# Altium PCB body.PcbDoc
Units mil, origin at the board's own origin, x right, y up, seen from the top; angles counter-clockwise.
Board outline 3199.5 x 3600.37 mil, 2 copper layers (Top Layer, Bottom Layer), stack 40.6 mil thick; 63 components, 68 nets, 275 pads, 47 vias.
Unrouted connection lines stored in the file: 49.
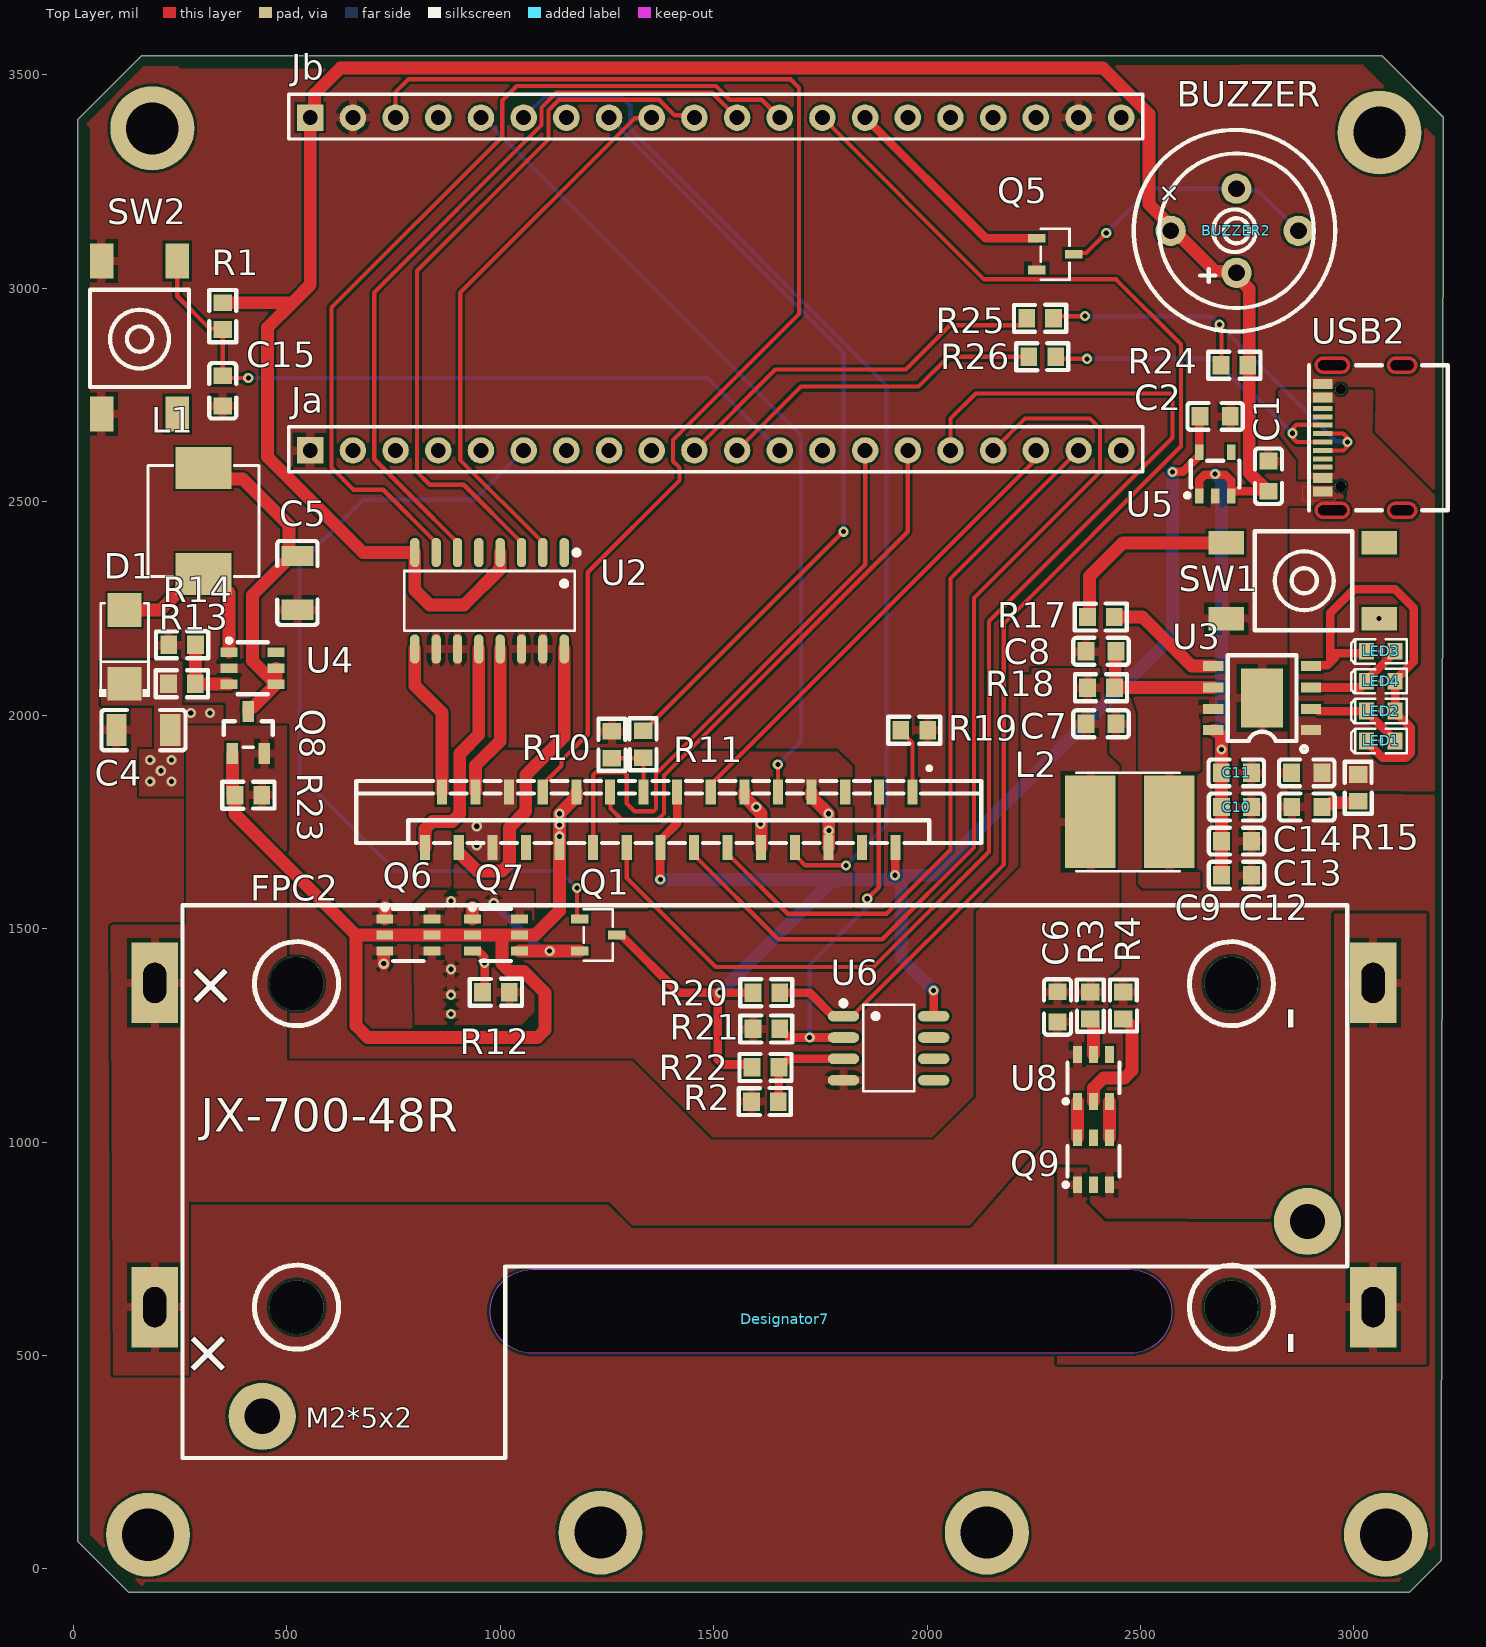
[diagram p0: Top Layer view]
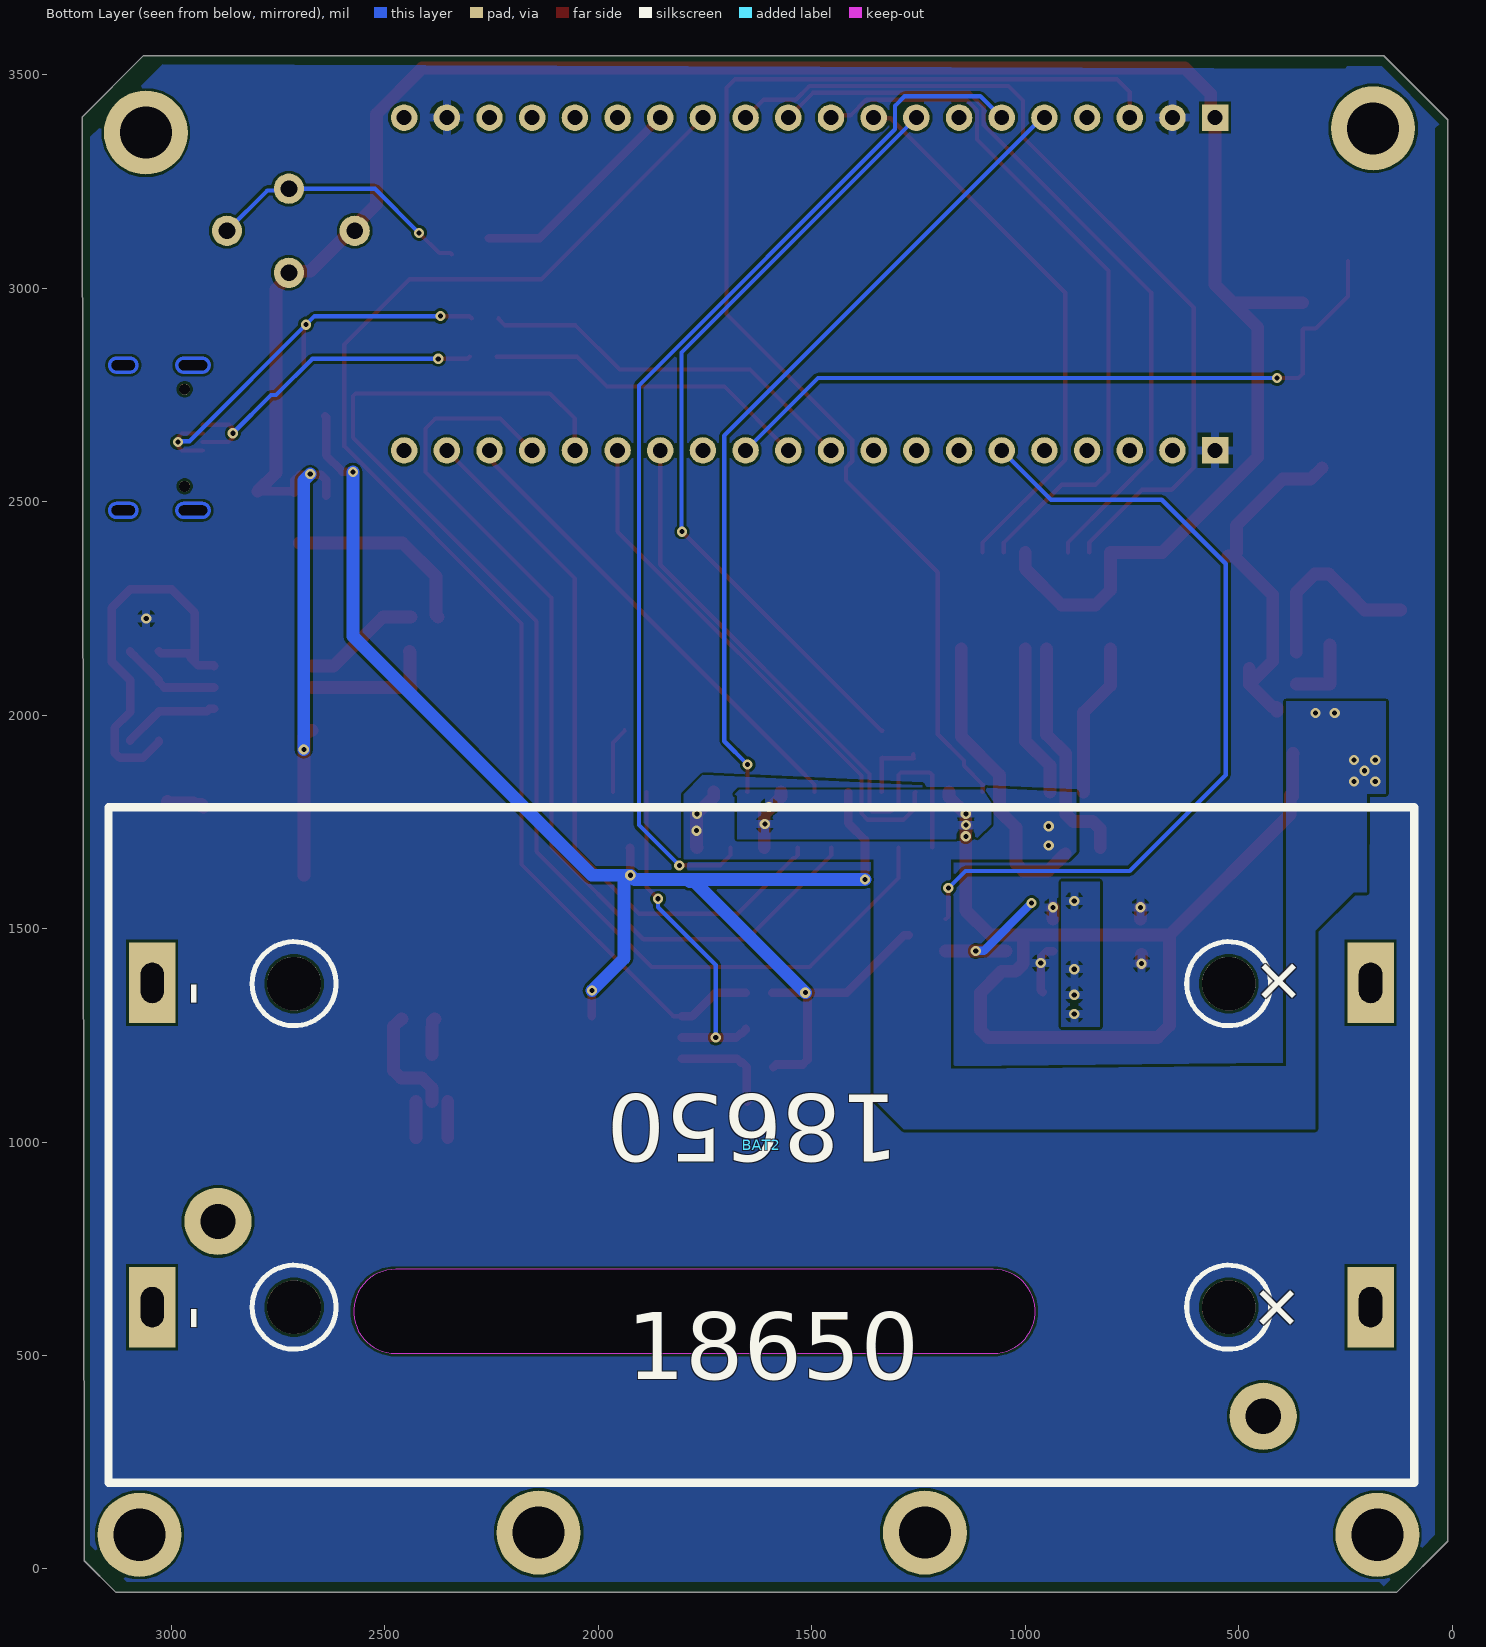
[diagram p1: Bottom Layer view, seen from below]

## Layer stack, top to bottom
Top Solder: solder mask 0.4, Solder Resist, Dk 3.5
Top Layer: signal copper 1.4
Dielectric 1: dielectric 12.6, FR-4, Dk 4.8
Dielectric3: dielectric 12.6, FR-4, Dk 4.8
Dielectric2: dielectric 12.6, FR-4, Dk 4.8
Bottom Layer: signal copper 1.4
Bottom Solder: solder mask 0.4, Solder Resist, Dk 3.5

## Board outline
10,65 10,3395 160,3545 162.77,3545.37 3065.34,3545.37 3209.5,3400.76 3204.21,19.09 3129.89,-55 130,-55
cut-out: 1075,701.85 2475,701.85 cw(c2475,603.42) 2475,505 1075,505 cw(c1075,603.42)
board region "Cavity : Designator7": 1071.22,704.16 2471.22,704.16 2480.92,704.16 2499.93,700.38 2517.84,692.96 2533.97,682.19 2547.67,668.48 2558.45,652.36 2565.87,634.45 2569.65,615.43 2569.65,596.04 2565.87,577.03 2558.45,559.12 2547.67,543 2533.97,529.29 2517.84,518.51 2499.93,511.1 2480.92,507.31 2471.22,507.31 1071.22,507.31 1061.53,507.31 1042.51,511.1 1024.6,518.51 1008.48,529.29 994.77,543 984,559.12 976.58,577.03 972.8,596.04 972.8,615.43 976.58,634.45 984,652.36 994.77,668.48 1008.48,682.19 1024.6,692.96 1042.51,700.38 1061.53,704.16
board region "Layer Stack Region 1": 10,65 10,3395 160,3545 162.77,3545.37 3065.35,3545.37 3209.5,3400.76 3204.21,19.09 3129.89,-55 130,-55

## Design rules (kind name [scope] priority, off if disabled: settings)
Clearance [All] p1: gap=6 ignorepadtopadclearanceinfootprint=FALSE
HoleSize [All] p1: absolutevalues=TRUE maxlimit=500 minlimit=1 maxpercent=80.000 minpercent=20.000
MinimumSolderMaskSliver [All] p1: minsoldermaskwidth=0
PolygonConnect G [InNet('GND') vs HasFootprint('USB-C-SMD_TYPE-C16PIN') And OnLayer('Top Layer')] p1: connectstyle=Direct reliefconductorwidth=10 reliefentries=4 polygonreliefangle="90 Angle" airgapwidth=10
PolygonConnect 5v [InNet('+5V')] p2: connectstyle=Direct reliefconductorwidth=10 reliefentries=4 polygonreliefangle="90 Angle" airgapwidth=10
PolygonConnect PolygonConnect_1 [InNet('VH')] p3: connectstyle=Direct reliefconductorwidth=10 reliefentries=4 polygonreliefangle="90 Angle" airgapwidth=0
PolygonConnect [All] p4: connectstyle=Relief reliefconductorwidth=20 reliefentries=4 polygonreliefangle="90 Angle" airgapwidth=10
RoutingVias [All] p1: holewidth=28 width=50 viastyle="Through Hole" minholewidth=28 minwidth=50 maxholewidth=28 maxwidth=50
SilkToSilkClearance [All] p1: silktosilkclearance=0
SilkToSolderMaskClearance [IsPad] p1: minsilkscreentomaskgap=0 clearancetoexposedcopper=TRUE
SolderMaskExpansion [All] p1: expansion=4 istentingtop=FALSE
Width [All] p1: maxlimit=40 minlimit=6 preferedwidth=10
26 further rules are at their usual default settings.

## Components (designator, comment, footprint, x,y, rotation, side; value= is the part's Value field where it differs from the comment)
BAT2 "18650两颗母座-插针" ? 1618,993.13 r0 bottom locked
BUZZER "TMB12A03" BUZ-TH_BD12.0-P7.60-D0.6-FD 2720.39,3135 r0 top (schematic designator BUZZER1)
BUZZER2 "HNB09A03" BUZ-TH_BD9.0-P5.00-D0.6-FD 2725,3135 r90 top
C1 "1u" C0603 2800,2560 r270 top
C2 "1u" C0603 2675,2700 r180 top
C4 "22u" C1206 164.28,1964.94 r180 top
C5 "22u" C1206 525,2310 r270 top
C6 "0.1u" C0603 2305.68,1316.6 r270 top
C7 "22u" C0603 2407.65,1979.95 r0 top
C8 "22u" C0603 2407.65,2149.8 r180 top
C9 "22u" C0603 2725,1705 r0 top
C10 "22u" C0603 2725,1785 r0 top
C11 "22u" C0603 2724.57,1865 r0 top
C12 "22u" C0603 2725,1625 r0 top
C13 "10u" C0603 2890,1785 r180 top
C14 "10u" C0603 2889.57,1865 r180 top
C15 "0.1u" C0603 350,2760 r270 top
D1 "SS34" SMA_L4.3-W2.6-LS5.2-RD 120,2160 r90 top
Designator7 "Comment" "PCBComponent_1 - duplicate" 1620,955 r0 top
FPC2 "F1003A-ZV-30-25T-R" FPC-SMD_F1003A-ZV-30-25T-R 1395,1755 r180 top locked
Ja "HDR-M-2.54_1x20" HDR-M-2.54_1X20 1505,2620.37 r180 top
Jb "HDR-M-2.54_1x20" HDR-M-2.54_1X20 1505,3400 r180 top
L1 "3.3uH" IND-SMD_L7.1-W6.6 305,2455 r270 top
L2 "1uH" IND-SMD_L5.8-W5.2 2475,1750 r0 top
LED1 "LED-0603_B" LED0603_RED 3062.96,1939.8 r180 top
LED2 "LED-0603_B" LED0603_RED 3062.96,2009.8 r180 top
LED3 "LED-0603_B" LED0603_RED 3062.96,2149.8 r180 top
LED4 "LED-0603_B" LED0603_RED 3062.96,2079.8 r180 top
Q1 "S8050" SOT-23-3_L3.0-W1.7-P0.95-LS2.9-BR 1230,1485 r180 top
Q5 "S8050" SOT-23-3_L3.0-W1.7-P0.95-LS2.9-BR 2300,3080 r180 top
Q6 "BR8205" SOT-23-6_L2.9-W1.6-P0.95-LS2.8-BR 784.88,1485 r180 top
Q7 "BR8205" SOT-23-6_L2.9-W1.6-P0.95-LS2.8-BR 990,1485 r180 top
Q8 "JMTL3401A" SOT-23-3_L2.9-W1.3-P1.90-LS2.4-BR 410,1960 r270 top
Q9 "BR8205" SOT-23-6_L2.9-W1.6-P0.95-LS2.8-BR 2390,955 r270 top
R1 "10k" R0603 350,2935 r90 top
R2 "10k" R0603 1620,1095 r0 top
R3 "330" R0603 2382.63,1319.76 r270 top
R4 "2.2K" R0603 2460,1320 r90 top
R10 "10k" R0603 1261.68,1930.84 r90 top
R11 "1k" R0603 1334.85,1932.07 r270 top
R12 "10k" R0603 990,1350.65 r180 top
R13 "11k" R0603 254.27,2073.64 r180 top
R14 "1k" R0603 255,2165 r0 top
R15 "2" R0603 3010,1830 r90 top
R17 "10k" R0603 2407.19,2230.15 r0 top
R18 "0.5" R0603 2407.65,2064.34 r180 top
R19 "100" R0603 1970,1965 r0 top
R20 "10k" R0603 1623.51,1350 r180 top
R21 "10k" R0603 1623.51,1265 r0 top
R22 "12k" R0603 1621.47,1174.78 r180 top
R23 "100K" R0603 410,1812.63 r180 top
R24 "4.7k" R0603 2720,2820 r0 top
R25 "22R" R0603 2265,2930 r0 top
R26 "22R" R0603 2270,2840 r180 top
SW1 "1TS005F-2500-5001" KEY-SMD_4P-L6.0-W6.0-P4.50 2880,2315 r180 top
SW2 "1TS005F-2500-5001" KEY-SMD_4P-L6.0-W6.0-P4.50 155,2885 r90 top
U2 "TC1508S" SOP-16_L10.0-W3.9-P1.27-LS6.0-BL 975,2268.09 r180 top
U3 "IP5306" ESOP-8_L4.9-W3.9-P1.27-LS6.0-BL-EP 2785,2040 r90 top
U4 "MT3608" SOT-23-6_L2.9-W1.6-P0.95-LS2.8-BR 420,2110 r180 top
U5 "XC6210B332MR" SOT-25_L3.0-W1.6-P0.95-LS2.8-BL 2675,2565 r0 top
U6 "LM393ADR_C404321" SOP-8_L4.9-W3.9-P1.27-LS6.0-BL 1910,1220 r270 top
U8 "WSTDW01" SOT-23-6_L2.9-W1.6-P0.95-LS2.8-BR 2390,1150.4 r270 top
USB2 "KH-TYPE-C-16P" USB-C-SMD_TYPE-C16PIN 3020,2650 r90 top

## Footprints (in the part's own frame and the unit in brackets; to place one, negate y for a bottom-side part, rotate by r counter-clockwise, add the part's x,y. Pads: shape width x height; smd on the part's side, far side on the other; paste and mask are expansions set on the pad)
BUZ-TH_BD9.0-P5.00-D0.6-FD [mm]
  round 1.8 hole 1: 1(-2.5,0) 2(2.5,0)
  silkscreen extent -4.6,-4.6 4.6,4.6
BUZ-TH_BD12.0-P7.60-D0.6-FD [mm]
  round 1.8 hole 1: 1(-3.8,0) 2(3.8,0)
  silkscreen extent -6,-6 6,6
C0603 [mm]
  rect 1x1.1 smd: 1(-0.9,0) 2(0.9,0)
  silkscreen extent -1.65,-0.8 1.65,0.8
C1206 [mm]
  rect 1.2x1.9 smd: 1(-1.6,0) 2(1.6,0)
  silkscreen extent -2.5,-1.2 2.5,1.2
ESOP-8_L4.9-W3.9-P1.27-LS6.0-BL-EP [mm]
  rect 0.6x1.2 smd: 1(-1.905,-2.908) 2(-0.635,-2.908) 3(0.635,-2.908) 4(1.905,-2.908) 5(1.905,2.908) 6(0.635,2.908) 7(-0.635,2.908) 8(-1.905,2.908)
  rect 3.5x2.5 smd: 9(0,0)
  silkscreen extent -3.2,-2.67 2.55,2.05
FPC-SMD_F1003A-ZV-30-25T-R [mm]
  rect 0.6x1.5 smd: 1(-14.5,-1.65) 2(-13.5,1.65) 3(-12.5,-1.65) 4(-11.5,1.65) 5(-10.5,-1.65) 6(-9.5,1.65) 7(-8.5,-1.65) 8(-7.5,1.65) 9(-6.5,-1.65) 10(-5.5,1.65) 11(-4.5,-1.65) 12(-3.5,1.65) 13(-2.5,-1.65) 14(-1.5,1.65) 15(-0.5,-1.65) 16(0.5,1.65) 17(1.5,-1.65) 18(2.5,1.65) 19(3.5,-1.65) 20(4.5,1.65) 21(5.5,-1.65) 22(6.5,1.65) 23(7.5,-1.65) 24(8.5,1.65) 25(9.5,-1.65) 26(10.5,1.65) 27(11.5,-1.65) 28(12.5,1.65) 29(13.5,-1.65) 30(14.5,1.65)
  silkscreen extent -18.6,-3.16 18.6,1.39
HDR-M-2.54_1X20 [mil]
  rect 62x62 hole 35: 1(950,0)
  round 62 hole 35: 2(850,0) 3(750,0) 4(650,0) 5(550,0) 6(450,0) 7(350,0) 8(250,0) 9(150,0) 10(50,0) 11(-50,0) 12(-150,0) 13(-250,0) 14(-350,0) 15(-450,0) 16(-550,0) 17(-650,0) 18(-750,0) 19(-850,0) 20(-950,0)
  silkscreen extent -1000,-55 1000,50
IND-SMD_L5.8-W5.2 [mm]
  rect 3x5.5 smd: 1(2.35,0) 2(-2.351,0)
  silkscreen extent -3.17,-2.92 2.98,2.92
IND-SMD_L7.1-W6.6 [mm]
  rect 2.474x3.32 smd: 1(3.153,0) 2(-3.153,0)
  silkscreen extent -3.3,-3.3 3.3,3.3
KEY-SMD_4P-L6.0-W6.0-P4.50 [mm]
  rect 2.1x1.4 smd: 1(4.551,-2.25) 2(-4.553,-2.25) 3(4.554,2.25) 4(-4.554,2.25)
  silkscreen extent -2.95,-2.95 2.85,2.95
LED0603_RED [mm]
  rect 0.9x1 smd: 1(-0.85,0) 2(0.85,0)
  silkscreen extent -1.54,-0.73 1.75,0.73
"PCBComponent_1 - duplicate" [mm]
  round 4 hole 2.1: 4(-29.911,-15.177) 5(32.289,-3.577)
  Keep-Out Layer board cut-out: -1216.629,-1208.934 -1181.069,-1208.934 -1180.823,-1208.934 -1180.34,-1209.03 -1179.885,-1209.219 -1179.475,-1209.492 -1179.127,-1209.841 -1178.853,-1210.25 -1178.665,-1210.705 -1178.569,-1211.188 -1178.569,-1211.68 -1178.665,-1212.163 -1178.853,-1212.618 -1179.127,-1213.028 -1179.475,-1213.376 -1179.885,-1213.65 -1180.34,-1213.838 -1180.823,-1213.934 -1181.069,-1213.934 -1181.069,-1213.934 -1181.069,-1213.934 -1216.629,-1213.934 -1216.875,-1213.934 -1217.358,-1213.838 -1217.813,-1213.65 -1218.223,-1213.376 -1218.571,-1213.028 -1218.844,-1212.618 -1219.033,-1212.163 -1219.129,-1211.68 -1219.129,-1211.188 -1219.033,-1210.705 -1218.844,-1210.25 -1218.571,-1209.841 -1218.223,-1209.492 -1217.813,-1209.219 -1217.358,-1209.03 -1216.875,-1208.934 -1216.629,-1208.934 -1216.629,-1208.934 -1216.629,-1208.934
  silkscreen extent -34.65,-17.66 34.65,15.24
R0603 [mm]
  rect 1x1.1 smd: 1(0.8,0) 2(-0.8,0)
  silkscreen extent -1.55,-0.81 1.55,0.8
SMA_L4.3-W2.6-LS5.2-RD [mm]
  rect 2x2 smd: 1(-2.2,0) 2(2.2,0)
  silkscreen extent -2.98,-1.5 2.6,1.5
SOP-8_L4.9-W3.9-P1.27-LS6.0-BL [mm]
  oval 0.63x1.865 smd: 1(-1.905,-2.682) 2(-0.635,-2.682) 3(0.635,-2.682) 4(1.905,-2.682) 5(1.905,2.682) 6(0.635,2.682) 7(-0.635,2.682) 8(-1.905,2.682)
  silkscreen extent -2.82,-2.83 2.58,1.52
SOP-16_L10.0-W3.9-P1.27-LS6.0-BL [mm]
  oval 0.56x1.745 smd: 1(-4.445,-2.873) 2(-3.175,-2.873) 3(-1.905,-2.873) 4(-0.635,-2.873) 5(0.635,-2.873) 6(1.905,-2.873) 7(3.175,-2.873) 8(4.445,-2.873) 9(4.445,2.873) 10(3.175,2.873) 11(1.905,2.873) 12(0.635,2.873) 13(-0.635,2.873) 14(-1.905,2.873) 15(-3.175,2.873) 16(-4.445,2.873)
  silkscreen extent -5.33,-3.02 5.08,1.77
SOT-23-3_L2.9-W1.3-P1.90-LS2.4-BR [mm]
  rect 1.25x0.7 smd: 1(1.25,-0.95) 2(1.25,0.95) 3(-1.25,0)
  silkscreen extent -0.65,-1.46 0.9,1.46
SOT-23-3_L3.0-W1.7-P0.95-LS2.9-BR [mm]
  rect 1.037x0.532 smd: 1(1.101,-0.95) 2(1.101,0.95) 3(-1.101,0)
  silkscreen extent -0.86,-1.53 0.86,1.53
SOT-23-6_L2.9-W1.6-P0.95-LS2.8-BR [mm]
  rect 1x0.55 smd: 1(1.4,-0.95) 2(1.4,0) 3(1.4,0.95) 4(-1.4,0.95) 5(-1.4,0) 6(-1.4,-0.95)
  silkscreen extent -0.9,-1.78 1.52,1.55
SOT-25_L3.0-W1.6-P0.95-LS2.8-BL [mm]
  rect 0.5x0.9 smd: 1(-0.95,-1.3) 2(0,-1.3) 3(0.95,-1.3) 4(0.95,1.3) 5(-0.95,1.3)
  silkscreen extent -1.78,-1.4 1.45,0.8
USB-C-SMD_TYPE-C16PIN [mm]
  round 0 hole 0.6 slot 1.7 at 90 deg: 1(-4.32,1.787) 2(4.32,1.788)
  round 0 hole 0.6 slot 1.4 at 90 deg: 3(-4.32,-2.363) 4(4.32,-2.362)
  rect 0.6x1.15 smd: A1B12(-3.2,2.362) A4B9(-2.4,2.362) B1A12(3.2,2.362) B4A9(2.4,2.362)
  rect 0.3x1.15 smd: A5(-1.25,2.362) A6(-0.25,2.362) A7(0.25,2.362) A8(-1.75,2.362) B5(1.75,2.362) B6(0.75,2.362) B7(-0.75,2.362) B8(1.25,2.362)
  round 0.65 hole 0.65 unplated: ""(-2.89,1.287) ""(2.89,1.287)
  Top Layer region: -4.82,2.337 -4.819,2.362 -4.817,2.387 -4.814,2.413 -4.81,2.437 -4.804,2.462 -4.797,2.487 -4.789,2.51 -4.779,2.534 -4.769,2.557 -4.757,2.579 -4.744,2.601 -4.73,2.622 -4.715,2.643 -4.699,2.663 -4.682,2.681 -4.665,2.699 -4.646,2.716 -4.626,2.732 -4.606,2.747 -4.584,2.761 -4.563,2.774 -4.54,2.786 -4.517,2.796 -4.494,2.806 -4.47,2.814 -4.445,2.821 -4.421,2.827 -4.396,2.831 -4.371,2.834 -4.345,2.836 -4.32,2.837 -4.295,2.836 -4.269,2.834 -4.244,2.831 -4.219,2.827 -4.195,2.821 -4.17,2.814 -4.146,2.806 -4.123,2.796 -4.1,2.786 -4.077,2.774 -4.056,2.761 -4.034,2.747 -4.014,2.732 -3.994,2.716 -3.976,2.699 -3.958,2.681 -3.941,2.663 -3.925,2.643 -3.91,2.622 -3.896,2.601 -3.883,2.579 -3.871,2.557 -3.861,2.534 -3.851,2.51 -3.843,2.487 -3.836,2.462 -3.83,2.437 -3.826,2.413 -3.823,2.387 -3.821,2.362 -3.82,2.337 -3.82,1.238 -3.821,1.213 -3.823,1.188 -3.826,1.162 -3.83,1.137 -3.836,1.113 -3.843,1.088 -3.851,1.064 -3.861,1.041 -3.871,1.018 -3.883,0.995 -3.896,0.974 -3.91,0.952 -3.925,0.932 -3.941,0.912 -3.958,0.894 -3.976,0.876 -3.994,0.859 -4.014,0.843 -4.034,0.828 -4.056,0.814 -4.077,0.801 -4.1,0.789 -4.123,0.779 -4.146,0.769 -4.17,0.761 -4.195,0.754 -4.219,0.748 -4.244,0.744 -4.269,0.741 -4.295,0.739 -4.32,0.738 -4.345,0.739 -4.371,0.741 -4.396,0.744 -4.421,0.748 -4.445,0.754 -4.47,0.761 -4.494,0.769 -4.517,0.779 -4.54,0.789 -4.563,0.801 -4.584,0.814 -4.606,0.828 -4.626,0.843 -4.646,0.859 -4.665,0.876 -4.682,0.894 -4.699,0.912 -4.715,0.932 -4.73,0.952 -4.744,0.974 -4.757,0.995 -4.769,1.018 -4.779,1.041 -4.789,1.064 -4.797,1.088 -4.804,1.113 -4.81,1.137 -4.814,1.162 -4.817,1.188 -4.819,1.213 -4.82,1.238
  Top Layer region: 3.82,2.337 3.821,2.362 3.823,2.387 3.826,2.413 3.83,2.438 3.836,2.462 3.843,2.487 3.851,2.511 3.861,2.534 3.871,2.557 3.883,2.58 3.896,2.601 3.91,2.623 3.925,2.643 3.941,2.663 3.958,2.681 3.976,2.699 3.994,2.716 4.014,2.732 4.034,2.747 4.056,2.761 4.077,2.774 4.1,2.786 4.123,2.796 4.146,2.806 4.17,2.814 4.195,2.821 4.219,2.827 4.244,2.831 4.269,2.834 4.295,2.836 4.32,2.837 4.345,2.836 4.371,2.834 4.396,2.831 4.421,2.827 4.445,2.821 4.47,2.814 4.494,2.806 4.517,2.796 4.54,2.786 4.563,2.774 4.584,2.761 4.606,2.747 4.626,2.732 4.646,2.716 4.664,2.699 4.682,2.681 4.699,2.663 4.715,2.643 4.73,2.623 4.744,2.601 4.757,2.58 4.769,2.557 4.779,2.534 4.789,2.511 4.797,2.487 4.804,2.462 4.81,2.438 4.814,2.413 4.817,2.387 4.819,2.362 4.82,2.337 4.82,1.238 4.819,1.213 4.817,1.188 4.814,1.162 4.81,1.138 4.804,1.113 4.797,1.088 4.789,1.065 4.779,1.041 4.769,1.018 4.757,0.996 4.744,0.974 4.73,0.953 4.715,0.932 4.699,0.912 4.682,0.894 4.664,0.876 4.646,0.859 4.626,0.843 4.606,0.828 4.584,0.814 4.563,0.801 4.54,0.789 4.517,0.779 4.494,0.769 4.47,0.761 4.445,0.754 4.421,0.748 4.396,0.744 4.371,0.741 4.345,0.739 4.32,0.738 4.295,0.739 4.269,0.741 4.244,0.744 4.219,0.748 4.195,0.754 4.17,0.761 4.146,0.769 4.123,0.779 4.1,0.789 4.077,0.801 4.056,0.814 4.034,0.828 4.014,0.843 3.994,0.859 3.976,0.876 3.958,0.894 3.941,0.912 3.925,0.932 3.91,0.953 3.896,0.974 3.883,0.996 3.871,1.018 3.861,1.041 3.851,1.065 3.843,1.088 3.836,1.113 3.83,1.138 3.826,1.162 3.823,1.188 3.821,1.213 3.82,1.238
  Top Layer region: -4.82,-1.963 -4.82,-1.938 -4.818,-1.912 -4.814,-1.887 -4.81,-1.862 -4.804,-1.838 -4.797,-1.813 -4.789,-1.789 -4.78,-1.766 -4.769,-1.743 -4.757,-1.72 -4.745,-1.699 -4.731,-1.677 -4.716,-1.657 -4.7,-1.637 -4.683,-1.619 -4.665,-1.601 -4.646,-1.584 -4.626,-1.568 -4.606,-1.553 -4.585,-1.539 -4.563,-1.526 -4.54,-1.514 -4.517,-1.504 -4.494,-1.494 -4.47,-1.486 -4.446,-1.479 -4.421,-1.473 -4.396,-1.469 -4.371,-1.466 -4.346,-1.464 -4.32,-1.463 -4.295,-1.464 -4.27,-1.466 -4.245,-1.469 -4.22,-1.473 -4.195,-1.479 -4.171,-1.486 -4.147,-1.494 -4.123,-1.504 -4.1,-1.514 -4.078,-1.526 -4.056,-1.539 -4.035,-1.553 -4.014,-1.568 -3.995,-1.584 -3.976,-1.601 -3.958,-1.619 -3.941,-1.637 -3.925,-1.657 -3.91,-1.677 -3.896,-1.699 -3.883,-1.72 -3.871,-1.743 -3.861,-1.766 -3.851,-1.789 -3.843,-1.813 -3.836,-1.838 -3.83,-1.862 -3.826,-1.887 -3.823,-1.912 -3.821,-1.938 -3.82,-1.963 -3.82,-2.762 -3.821,-2.787 -3.823,-2.812 -3.826,-2.837 -3.83,-2.862 -3.836,-2.887 -3.843,-2.911 -3.851,-2.935 -3.861,-2.959 -3.871,-2.982 -3.883,-3.004 -3.896,-3.026 -3.91,-3.047 -3.925,-3.068 -3.941,-3.087 -3.958,-3.106 -3.976,-3.124 -3.995,-3.141 -4.014,-3.157 -4.035,-3.172 -4.056,-3.186 -4.078,-3.199 -4.1,-3.211 -4.123,-3.221 -4.147,-3.231 -4.171,-3.239 -4.195,-3.246 -4.22,-3.252 -4.245,-3.256 -4.27,-3.259 -4.295,-3.261 -4.32,-3.262 -4.346,-3.261 -4.371,-3.259 -4.396,-3.256 -4.421,-3.252 -4.446,-3.246 -4.47,-3.239 -4.494,-3.231 -4.517,-3.221 -4.54,-3.211 -4.563,-3.199 -4.585,-3.186 -4.606,-3.172 -4.626,-3.157 -4.646,-3.141 -4.665,-3.124 -4.683,-3.106 -4.7,-3.087 -4.716,-3.068 -4.731,-3.047 -4.745,-3.026 -4.757,-3.004 -4.769,-2.982 -4.78,-2.959 -4.789,-2.935 -4.797,-2.911 -4.804,-2.887 -4.81,-2.862 -4.814,-2.837 -4.818,-2.812 -4.82,-2.787 -4.82,-2.762
  Top Layer region: 3.82,-1.963 3.82,-1.938 3.822,-1.912 3.826,-1.887 3.83,-1.862 3.836,-1.838 3.843,-1.813 3.851,-1.789 3.86,-1.766 3.871,-1.743 3.883,-1.72 3.895,-1.698 3.909,-1.677 3.924,-1.657 3.94,-1.637 3.957,-1.618 3.975,-1.601 3.994,-1.584 4.014,-1.568 4.034,-1.553 4.055,-1.539 4.077,-1.526 4.1,-1.514 4.123,-1.503 4.146,-1.494 4.17,-1.486 4.195,-1.479 4.219,-1.473 4.244,-1.469 4.269,-1.466 4.295,-1.464 4.32,-1.463 4.345,-1.464 4.37,-1.466 4.396,-1.469 4.42,-1.473 4.445,-1.479 4.47,-1.486 4.493,-1.494 4.517,-1.503 4.54,-1.514 4.562,-1.526 4.584,-1.539 4.605,-1.553 4.626,-1.568 4.646,-1.584 4.664,-1.601 4.682,-1.618 4.699,-1.637 4.715,-1.657 4.73,-1.677 4.744,-1.698 4.757,-1.72 4.769,-1.743 4.779,-1.766 4.789,-1.789 4.797,-1.813 4.804,-1.838 4.81,-1.862 4.814,-1.887 4.817,-1.912 4.819,-1.938 4.82,-1.963 4.82,-2.762 4.819,-2.787 4.817,-2.812 4.814,-2.837 4.81,-2.862 4.804,-2.887 4.797,-2.911 4.789,-2.935 4.779,-2.959 4.769,-2.982 4.757,-3.004 4.744,-3.026 4.73,-3.047 4.715,-3.068 4.699,-3.087 4.682,-3.106 4.664,-3.124 4.646,-3.141 4.626,-3.157 4.605,-3.172 4.584,-3.186 4.562,-3.199 4.54,-3.211 4.517,-3.221 4.493,-3.231 4.47,-3.239 4.445,-3.246 4.42,-3.251 4.396,-3.256 4.37,-3.259 4.345,-3.261 4.32,-3.262 4.295,-3.261 4.269,-3.259 4.244,-3.256 4.219,-3.251 4.195,-3.246 4.17,-3.239 4.146,-3.231 4.123,-3.221 4.1,-3.211 4.077,-3.199 4.055,-3.186 4.034,-3.172 4.014,-3.157 3.994,-3.141 3.975,-3.124 3.957,-3.106 3.94,-3.087 3.924,-3.068 3.909,-3.047 3.895,-3.026 3.883,-3.004 3.871,-2.982 3.86,-2.959 3.851,-2.935 3.843,-2.911 3.836,-2.887 3.83,-2.862 3.826,-2.837 3.822,-2.812 3.82,-2.787 3.82,-2.762
  Bottom Layer region: -4.82,2.337 -4.819,2.362 -4.817,2.387 -4.814,2.413 -4.81,2.437 -4.804,2.462 -4.797,2.487 -4.789,2.51 -4.779,2.534 -4.769,2.557 -4.757,2.579 -4.744,2.601 -4.73,2.622 -4.715,2.643 -4.699,2.663 -4.682,2.681 -4.665,2.699 -4.646,2.716 -4.626,2.732 -4.606,2.747 -4.584,2.761 -4.563,2.774 -4.54,2.786 -4.517,2.796 -4.494,2.806 -4.47,2.814 -4.445,2.821 -4.421,2.827 -4.396,2.831 -4.371,2.834 -4.345,2.836 -4.32,2.837 -4.295,2.836 -4.269,2.834 -4.244,2.831 -4.219,2.827 -4.195,2.821 -4.17,2.814 -4.146,2.806 -4.123,2.796 -4.1,2.786 -4.077,2.774 -4.056,2.761 -4.034,2.747 -4.014,2.732 -3.994,2.716 -3.976,2.699 -3.958,2.681 -3.941,2.663 -3.925,2.643 -3.91,2.622 -3.896,2.601 -3.883,2.579 -3.871,2.557 -3.861,2.534 -3.851,2.51 -3.843,2.487 -3.836,2.462 -3.83,2.437 -3.826,2.413 -3.823,2.387 -3.821,2.362 -3.82,2.337 -3.82,1.238 -3.821,1.213 -3.823,1.188 -3.826,1.162 -3.83,1.137 -3.836,1.113 -3.843,1.088 -3.851,1.064 -3.861,1.041 -3.871,1.018 -3.883,0.995 -3.896,0.974 -3.91,0.952 -3.925,0.932 -3.941,0.912 -3.958,0.894 -3.976,0.876 -3.994,0.859 -4.014,0.843 -4.034,0.828 -4.056,0.814 -4.077,0.801 -4.1,0.789 -4.123,0.779 -4.146,0.769 -4.17,0.761 -4.195,0.754 -4.219,0.748 -4.244,0.744 -4.269,0.741 -4.295,0.739 -4.32,0.738 -4.345,0.739 -4.371,0.741 -4.396,0.744 -4.421,0.748 -4.445,0.754 -4.47,0.761 -4.494,0.769 -4.517,0.779 -4.54,0.789 -4.563,0.801 -4.584,0.814 -4.606,0.828 -4.626,0.843 -4.646,0.859 -4.665,0.876 -4.682,0.894 -4.699,0.912 -4.715,0.932 -4.73,0.952 -4.744,0.974 -4.757,0.995 -4.769,1.018 -4.779,1.041 -4.789,1.064 -4.797,1.088 -4.804,1.113 -4.81,1.137 -4.814,1.162 -4.817,1.188 -4.819,1.213 -4.82,1.238
  Bottom Layer region: 3.82,2.337 3.821,2.362 3.823,2.387 3.826,2.413 3.83,2.438 3.836,2.462 3.843,2.487 3.851,2.511 3.861,2.534 3.871,2.557 3.883,2.58 3.896,2.601 3.91,2.623 3.925,2.643 3.941,2.663 3.958,2.681 3.976,2.699 3.994,2.716 4.014,2.732 4.034,2.747 4.056,2.761 4.077,2.774 4.1,2.786 4.123,2.796 4.146,2.806 4.17,2.814 4.195,2.821 4.219,2.827 4.244,2.831 4.269,2.834 4.295,2.836 4.32,2.837 4.345,2.836 4.371,2.834 4.396,2.831 4.421,2.827 4.445,2.821 4.47,2.814 4.494,2.806 4.517,2.796 4.54,2.786 4.563,2.774 4.584,2.761 4.606,2.747 4.626,2.732 4.646,2.716 4.664,2.699 4.682,2.681 4.699,2.663 4.715,2.643 4.73,2.623 4.744,2.601 4.757,2.58 4.769,2.557 4.779,2.534 4.789,2.511 4.797,2.487 4.804,2.462 4.81,2.438 4.814,2.413 4.817,2.387 4.819,2.362 4.82,2.337 4.82,1.238 4.819,1.213 4.817,1.188 4.814,1.162 4.81,1.138 4.804,1.113 4.797,1.088 4.789,1.065 4.779,1.041 4.769,1.018 4.757,0.996 4.744,0.974 4.73,0.953 4.715,0.932 4.699,0.912 4.682,0.894 4.664,0.876 4.646,0.859 4.626,0.843 4.606,0.828 4.584,0.814 4.563,0.801 4.54,0.789 4.517,0.779 4.494,0.769 4.47,0.761 4.445,0.754 4.421,0.748 4.396,0.744 4.371,0.741 4.345,0.739 4.32,0.738 4.295,0.739 4.269,0.741 4.244,0.744 4.219,0.748 4.195,0.754 4.17,0.761 4.146,0.769 4.123,0.779 4.1,0.789 4.077,0.801 4.056,0.814 4.034,0.828 4.014,0.843 3.994,0.859 3.976,0.876 3.958,0.894 3.941,0.912 3.925,0.932 3.91,0.953 3.896,0.974 3.883,0.996 3.871,1.018 3.861,1.041 3.851,1.065 3.843,1.088 3.836,1.113 3.83,1.138 3.826,1.162 3.823,1.188 3.821,1.213 3.82,1.238
  Bottom Layer region: -4.82,-1.963 -4.82,-1.938 -4.818,-1.912 -4.814,-1.887 -4.81,-1.862 -4.804,-1.838 -4.797,-1.813 -4.789,-1.789 -4.78,-1.766 -4.769,-1.743 -4.757,-1.72 -4.745,-1.699 -4.731,-1.677 -4.716,-1.657 -4.7,-1.637 -4.683,-1.619 -4.665,-1.601 -4.646,-1.584 -4.626,-1.568 -4.606,-1.553 -4.585,-1.539 -4.563,-1.526 -4.54,-1.514 -4.517,-1.504 -4.494,-1.494 -4.47,-1.486 -4.446,-1.479 -4.421,-1.473 -4.396,-1.469 -4.371,-1.466 -4.346,-1.464 -4.32,-1.463 -4.295,-1.464 -4.27,-1.466 -4.245,-1.469 -4.22,-1.473 -4.195,-1.479 -4.171,-1.486 -4.147,-1.494 -4.123,-1.504 -4.1,-1.514 -4.078,-1.526 -4.056,-1.539 -4.035,-1.553 -4.014,-1.568 -3.995,-1.584 -3.976,-1.601 -3.958,-1.619 -3.941,-1.637 -3.925,-1.657 -3.91,-1.677 -3.896,-1.699 -3.883,-1.72 -3.871,-1.743 -3.861,-1.766 -3.851,-1.789 -3.843,-1.813 -3.836,-1.838 -3.83,-1.862 -3.826,-1.887 -3.823,-1.912 -3.821,-1.938 -3.82,-1.963 -3.82,-2.762 -3.821,-2.787 -3.823,-2.812 -3.826,-2.837 -3.83,-2.862 -3.836,-2.887 -3.843,-2.911 -3.851,-2.935 -3.861,-2.959 -3.871,-2.982 -3.883,-3.004 -3.896,-3.026 -3.91,-3.047 -3.925,-3.068 -3.941,-3.087 -3.958,-3.106 -3.976,-3.124 -3.995,-3.141 -4.014,-3.157 -4.035,-3.172 -4.056,-3.186 -4.078,-3.199 -4.1,-3.211 -4.123,-3.221 -4.147,-3.231 -4.171,-3.239 -4.195,-3.246 -4.22,-3.252 -4.245,-3.256 -4.27,-3.259 -4.295,-3.261 -4.32,-3.262 -4.346,-3.261 -4.371,-3.259 -4.396,-3.256 -4.421,-3.252 -4.446,-3.246 -4.47,-3.239 -4.494,-3.231 -4.517,-3.221 -4.54,-3.211 -4.563,-3.199 -4.585,-3.186 -4.606,-3.172 -4.626,-3.157 -4.646,-3.141 -4.665,-3.124 -4.683,-3.106 -4.7,-3.087 -4.716,-3.068 -4.731,-3.047 -4.745,-3.026 -4.757,-3.004 -4.769,-2.982 -4.78,-2.959 -4.789,-2.935 -4.797,-2.911 -4.804,-2.887 -4.81,-2.862 -4.814,-2.837 -4.818,-2.812 -4.82,-2.787 -4.82,-2.762
  Bottom Layer region: 3.82,-1.963 3.82,-1.938 3.822,-1.912 3.826,-1.887 3.83,-1.862 3.836,-1.838 3.843,-1.813 3.851,-1.789 3.86,-1.766 3.871,-1.743 3.883,-1.72 3.895,-1.698 3.909,-1.677 3.924,-1.657 3.94,-1.637 3.957,-1.618 3.975,-1.601 3.994,-1.584 4.014,-1.568 4.034,-1.553 4.055,-1.539 4.077,-1.526 4.1,-1.514 4.123,-1.503 4.146,-1.494 4.17,-1.486 4.195,-1.479 4.219,-1.473 4.244,-1.469 4.269,-1.466 4.295,-1.464 4.32,-1.463 4.345,-1.464 4.37,-1.466 4.396,-1.469 4.42,-1.473 4.445,-1.479 4.47,-1.486 4.493,-1.494 4.517,-1.503 4.54,-1.514 4.562,-1.526 4.584,-1.539 4.605,-1.553 4.626,-1.568 4.646,-1.584 4.664,-1.601 4.682,-1.618 4.699,-1.637 4.715,-1.657 4.73,-1.677 4.744,-1.698 4.757,-1.72 4.769,-1.743 4.779,-1.766 4.789,-1.789 4.797,-1.813 4.804,-1.838 4.81,-1.862 4.814,-1.887 4.817,-1.912 4.819,-1.938 4.82,-1.963 4.82,-2.762 4.819,-2.787 4.817,-2.812 4.814,-2.837 4.81,-2.862 4.804,-2.887 4.797,-2.911 4.789,-2.935 4.779,-2.959 4.769,-2.982 4.757,-3.004 4.744,-3.026 4.73,-3.047 4.715,-3.068 4.699,-3.087 4.682,-3.106 4.664,-3.124 4.646,-3.141 4.626,-3.157 4.605,-3.172 4.584,-3.186 4.562,-3.199 4.54,-3.211 4.517,-3.221 4.493,-3.231 4.47,-3.239 4.445,-3.246 4.42,-3.251 4.396,-3.256 4.37,-3.259 4.345,-3.261 4.32,-3.262 4.295,-3.261 4.269,-3.259 4.244,-3.256 4.219,-3.251 4.195,-3.246 4.17,-3.239 4.146,-3.231 4.123,-3.221 4.1,-3.211 4.077,-3.199 4.055,-3.186 4.034,-3.172 4.014,-3.157 3.994,-3.141 3.975,-3.124 3.957,-3.106 3.94,-3.087 3.924,-3.068 3.909,-3.047 3.895,-3.026 3.883,-3.004 3.871,-2.982 3.86,-2.959 3.851,-2.935 3.843,-2.911 3.836,-2.887 3.83,-2.862 3.826,-2.837 3.822,-2.812 3.82,-2.787 3.82,-2.762
  silkscreen extent -4.32,-5.08 4.32,3.17
? [mm]
  rect 2.76x4.8 hole 1.38 slot 2.4 at 90 deg: 1(-36.25,9.65) 2(36.25,9.65) 3(-36.25,-9.65) 4(36.25,-9.65)
  round 3.2 hole 3.2 unplated: ""(-27.81,-9.6) ""(-27.81,9.65) ""(27.81,-9.6) ""(27.81,9.65)
  silkscreen extent -38.85,-20.11 38.85,20.1

## Part data
BUZZER: BOM_Manufacturer=HNDZ, BOM_Manufacturer Part=TMB12A03, BOM_Paste Type=expand, BOM_Supplier=LCSC, BOM_Supplier Part=C96222, spicePre=B, spiceSymbolName=TMB12A03
BUZZER2: BOM_Manufacturer="Jiangsu Huaneng Elec", BOM_Manufacturer Part=HNB09A03, BOM_Paste Type=expand, BOM_Supplier=LCSC, BOM_Supplier Part=C96102, Contributor=LCSC, spicePre=B, spiceSymbolName=HNB09A03
D1: BOM_Manufacturer=KEXIN, BOM_Manufacturer Part=SS34, BOM_Paste Type=expand, BOM_Supplier=LCSC, BOM_Supplier Part=C489140, Contributor=LCSC, spicePre=D, spiceSymbolName=SS34_C489140
FPC2: BOM_JLCPCB Part Class="Extended Part", BOM_Manufacturer=XFCN, BOM_Manufacturer Part=F1003A-ZV-30-25T-R, BOM_Supplier=LCSC, BOM_Supplier Part=C781900, Contributor=LCSC, spicePre=F, spiceSymbolName=F1003A-ZV-30-25T-R
L1: BOM_Manufacturer="PROD Tech", BOM_Manufacturer Part=PSPMAC0603H-220M-ANF, BOM_Supplier=LCSC, BOM_Supplier Part=C705336, Contributor=LCSC, nameAlias=Inductance, spicePre=L, spiceSymbolName=PSPMAC0603H-220M-ANF
L2: BOM_Manufacturer=YJYCOIN, BOM_Manufacturer Part=YP0503-1R0M, BOM_Supplier=LCSC, BOM_Supplier Part=C576592, Contributor=LCSC, nameAlias=Inductance, spicePre=L, spiceSymbolName=YP0503-1R0M
LED1 LED2 LED3 LED4: BOM_Manufacturer=EVERLIGHT(台湾亿光), BOM_Manufacturer Part=19-217/BHC-ZL1M2RY/3T, BOM_Supplier=LCSC, BOM_Supplier Part=C72041, Contributor=LCEDA_01, spicePre=L, spiceSymbolName=LED-0603_B
Q1 Q5: BOM_Manufacturer="(MDD) Jiangsu Yutai Elec", BOM_Manufacturer Part=S8050-J3Y, BOM_Paste Type=expand, BOM_Supplier=LCSC, BOM_Supplier Part=C364312, Contributor=LCSC, spicePre=Q, spiceSymbolName=S8050-J3Y
Q6 Q7 Q9: BOM_Manufacturer="BLUE ROCKET", BOM_Manufacturer Part=BR8205, BOM_Paste Type=expand, BOM_Supplier=LCSC, BOM_Supplier Part=C305455, Contributor=LCSC, spicePre=Q, spiceSymbolName=BR8205
Q8: BOM_JLCPCB SMD=Yes, BOM_Manufacturer="Jiangsu JieJie Microelectronics", BOM_Manufacturer Part=JMTL3401A, BOM_Supplier=LCSC, BOM_Supplier Part=C394037, Contributor=LCSC, SMT Type=Extend, spicePre=Q, spiceSymbolName=JMTL3401A
R24 R25 R26: library part 11k, Contributor=LCEDA_Lib, nameAlias=Value(Ω), spicePre=R, spiceSymbolName=R_0603_EU
SW1 SW2: BOM_JLCPCB Part Class="Extended Part", BOM_Manufacturer=HYP, BOM_Manufacturer Part=1TS005F-2500-5001, BOM_Supplier=LCSC, BOM_Supplier Part=C255812, Contributor=LCSC, spicePre=S, spiceSymbolName=1TS005F-2500-5001
U2: BOM_Manufacturer=FM, BOM_Manufacturer Part=TC1508S, BOM_Paste Type=expand, BOM_Supplier=LCSC, BOM_Supplier Part=C89480, spicePre=U, spiceSymbolName=TC1508S
U3: BOM_JLCPCB Part Class="Extended Part", BOM_Manufacturer=INJOINIC, BOM_Manufacturer Part=IP5306, BOM_Supplier=LCSC, BOM_Supplier Part=C181692, Contributor=LCSC, spicePre=U, spiceSymbolName=IP5306
U4: BOM_Manufacturer=AEROSEMI, BOM_Manufacturer Part=MT3608, BOM_Paste Type=recommend, BOM_Supplier=LCSC, BOM_Supplier Part=C84817, spicePre=U, spiceSymbolName=MT3608
U5: BOM_JLCPCB SMD=Yes, BOM_Manufacturer="Torex Semicon", BOM_Manufacturer Part=XC6210B332MR, BOM_Supplier=LCSC, BOM_Supplier Part=C424705, Contributor=LCSC, SMT Type=Extend, spicePre=U, spiceSymbolName=XC6210B332MR_C424705
U6: BOM_Manufacturer="Youtai Semiconductor Co., Ltd.", BOM_Manufacturer Part=LM393ADR, BOM_Supplier=LCSC, BOM_Supplier Part=C404321, spicePre=U, spiceSymbolName=LM393ADR_C404321, subpart_no=1
U8: BOM_Manufacturer=WINSOK, BOM_Manufacturer Part=WSTDW01, BOM_Paste Type=expand, BOM_Supplier=LCSC, BOM_Supplier Part=C86873, spicePre=U, spiceSymbolName=WSTDW01
USB2: BOM_Manufacturer="Shenzhen Kinghelm Elec", BOM_Manufacturer Part=KH-TYPE-C-16P, BOM_Supplier=LCSC, BOM_Supplier Part=C709357, Contributor=LCSC, spicePre=U, spiceSymbolName=KH-TYPE-C-16P
C1 C2 C6 C7 C8 C9 C10 C11 C12 C13 C14 C15: Contributor=LCEDA_Lib, nameAlias=Value(F), spicePre=C, spiceSymbolName=C_0603_EU
C4 C5: Contributor=LCEDA_Lib, nameAlias=Value(F), spicePre=C, spiceSymbolName=C_1206_EU
Ja Jb: BOM_Supplier=LCSC, BOM_Supplier Part=C50981, Contributor=LCEDA_Lib, spicePre=J, spiceSymbolName=HDR-M-2.54_1x20
R1 R2 R3 R4 R10 R11 R12 R13 R14 R15 R17 R18 R19 R20 R21 R22 R23: Contributor=LCEDA_Lib, nameAlias=Value(Ω), spicePre=R, spiceSymbolName=R_0603_EU

## Free pads (board coordinates)
  round 196.85 hole 122.05: 1(175,80) 1(185,3375) 1(1235,85) 1(2140,85) 1(3060,3365) 1(3075,80)

## Via types
v1: diameter 24, hole 12, Top Layer to Bottom Layer, 47 vias

## Nets (pads, with @x,y where several pads share a name; then routed paths per layer and width w, separated by ;. In a path a pad name is that pad's centre, name@x,y a point inside that pad or via, vN(x,y) a via of type N, cw(c..) or ccw(c..) an arc to the next point about the centre after c; other vN are vias at no path point)
3V3: C2.2 FPC2.2 FPC2.15 FPC2.16 Q1.3 R20.1 R22.1 U5.5 U6.8 | length 3633.1
  Top Layer w20: Q1.3 1283.31,1485 1418.31,1350 v1(1515,1350) ; FPC2.15 1414.69,1747.13 1375.31,1707.75 FPC2.16 FPC2.16 v1@1375.27,1615.27 ; v1@1510,1350 1510,1193.5 1521.72,1181.78 1582.97,1181.78 R22.1 ; v1@1513.15,1350 R20.1 ; v1(1925,1625) 1925.75,1625.75 1925.75,1689.29 FPC2.2 ; v1(2015,1355) 2015.61,1354.39 U6.8 ; v1(2575,2570) 2575.77,2570.77 2599.74,2570.77 2637.76,2608.78 U5.5@2637.76,2616.34 ; U5.5 U5.5@2637.76,2616.34 ; C2.2 2637.76,2698.19 U5.5@2637.76,2616.34 ; v1(1375.23,1615.23) v1@1375.27,1615.27
  Bottom Layer w30: v1(1375.23,1615.23) 1915.23,1615.23 v1(1925,1625) 2015,1625 2575,2185 v1(2575,2570) ; v1(1515,1350) 1775,1610 1785,1610 ; v1@1932.96,1617.04 1940,1610 1940,1430 v1(2015,1355)
+5V: C14.1 R15.1 U3.1 USB2.A4B9 USB2.B4A9
BAT: BAT2.1 BAT2.3 C6.1 C7.1 L2.2 Q8.2 R3.2 R18.1 R23.2
BAT-: BAT2.2 BAT2.4 Q9.1
GND: C1.1 C2.1 C4.2 C5.2 C6.2 C7.2 C8.2 C9.2 C10.2 C11.2 C12.2 C13.2 C14.2 C15.2 Ja.1 Jb.2 Jb.19 Q5.2 Q6.1 Q6.3 Q7.1 Q7.3 Q9.3 R2.2 R4.1 R10.1 R12.1 R14.2 R19.1 R21.2 SW1.3 SW1.4 SW2.3 SW2.4 U2.10 U2.11 U2.14 U2.15 U3.9 U4.2 U5.2 U6.4 U8.6 USB2.1 USB2.2 USB2.3 USB2.4 USB2.A1B12 USB2.B1A12 | length 198.4
  Top Layer w10: SW1.4@3057.86,2225 v1(3059.27,2226.41)
  Top Layer w20: Q7.3 935.71,1446.77 949.78,1446.77 962.73,1433.82 962.73,1420.13 v1(963.49,1419.36) 963.49,1355.64 R12.1
  Top Layer w30: v1(727.38,1418.06) Q6.3@727.38,1440 ; Q6.1 730,1522.64 v1(730,1550) ; Q7.1 935,1522.52 v1(935,1550)
NetBUZZER1_2: BUZZER2.2 BUZZER.2 Q5.3 | length 631
  Top Layer w10: Q5.3 2346.09,3082.73 2372.73,3082.73 v1(2420,3130)
  Bottom Layer w10: v1(2420,3130) 2523.42,3233.42 BUZZER2.2 2728.85,3229.57 2775.43,3229.57 BUZZER.2
NetC5_1: C5.1 L1.2 Q8.3 U4.4 U4.5 | length 837.2
  Top Layer w30: L1.2 330.91,2553.22 396.78,2553.22 505,2445 505,2381.61 513.62,2372.99 C5.1 ; Q8.3 410,2017.59 411.22,2018.81 420.82,2018.81 U4.4@474.61,2072.6 ; U4.4 U4.4@474.61,2072.6 ; U4.5 475.12,2073.11 U4.4@474.61,2072.6 ; C5.1@511.22,2372.99 420,2281.77 420,2127.21 U4.4@474.61,2072.6
NetC8_1: C8.1 R18.2 U3.6 | length 318.3
  Top Layer w30: R18.2 R18.2@2439.47,2064.67 ; C8.1 2441.11,2147.84 2441.11,2066.31 R18.2@2439.47,2064.67 ; U3.6 2670.17,2064.67 R18.2@2439.47,2064.67
NetC13_1: C13.1 R15.2 | length 91.3
  Top Layer w30: C13.1 2925.43,1786.97 2930.12,1791.65 2944.34,1791.65 2947.69,1795 3006.49,1795 R15.2
NetD1_2: D1.2 L1.1 U4.1 | length 438.1
  Top Layer w30: D1.2 204.37,2246.62 225.58,2267.83 225.58,2268.1 288.35,2330.87 L1.1 321.65,2330.87 364.88,2287.64 U4.1
NetFPC2_1: FPC2.1 R19.2 | length 156.4
  Top Layer w10: R19.2 1938.51,1963.03 1965.87,1935.67 FPC2.1
NetFPC2_3: FPC2.3 R21.1 U6.2 | length 800.9
  Top Layer w10: v1(1860,1570) 1887.13,1597.13 FPC2.3
  Top Layer w20: R21.1 1655,1263.03 1664.69,1253.35 1668.05,1253.35 1676.4,1245 v1(1725,1245) U6.2
  Bottom Layer w10: v1(1725,1245) 1725,1415 1860,1550 v1(1860,1570)
NetFPC2_17: FPC2.17 R10.2 R11.1 | length 163.8
  Top Layer w10: R10.2@1260.8,1899.35 R10.2 R10.2@1262.5,1899.35 ; R10.2@1262.5,1908.52 R10.2@1262.5,1899.35 ; R11.1 1333.62,1899.35 R10.2@1262.5,1899.35 ; R11.1@1335.83,1900 1335.83,1820.08 FPC2.17
NetFPC2_27: FPC2.27 U2.13 | length 359
  Top Layer w30: FPC2.27 942.24,1882.2 1000,1939.96 U2.13
NetFPC2_28: FPC2.28 U2.16 | length 695.3
  Top Layer w30: FPC2.28@906.07,1675.51 946.58,1635 1004.2,1635 1021.77,1652.57 1021.77,1736.77 1060,1775 1060,1860 1150,1950 U2.16
NetFPC2_29: FPC2.29 U2.9 | length 361.3
  Top Layer w30: U2.9 800,2070 863.5,2006.5 FPC2.29
NetFPC2_30: FPC2.30 U2.12 | length 544
  Top Layer w30: FPC2.30 824.14,1733.13 841.71,1750.7 887.58,1750.7 905.15,1768.27 905.15,1909.94 950,1954.79 U2.12
NetL2_1: L2.1 U3.7
NetLED1_1: LED1.1 LED2.2 U3.2 | length 230.4
  Top Layer w20: U3.2 2911.31,2015 2916.51,2009.8 LED2.2 3029.5,2007.83 3037.22,2000.12 3038.09,2000.12 3096.43,1941.77 LED1.1
NetLED1_2: LED1.2 LED2.1 LED3.2 LED4.1 U3.4 | length 990.3
  Top Layer w20: U3.4 2901.31,2116.81 2937.81,2116.81 2945,2124 ; 2956.49,2135.48 2945,2124 ; 2957.56,2145 3024.7,2145 LED3.2 ; LED1.2 3029.5,1937.83 3067.12,1900.21 3121.57,1900.21 3133.28,1911.93 3133.28,1970.98 3096.43,2007.83 LED4.1 3096.43,2081.77 3139.9,2125.25 3139.9,2251.76 3096.66,2295 3000,2295 2945,2240 2945,2124
NetLED3_1: LED3.1 LED4.2 U3.3 | length 235.5
  Top Layer w20: U3.3 3016.67,2065 3029.5,2077.83 LED4.2 3029.5,2081.77 3087.85,2140.12 3088.72,2140.12 3096.43,2147.83 LED3.1
NetQ1_2: Q1.2 Q6.4 Q6.6 Q7.4 Q7.6 R12.2 | length 319
  Top Layer w30: Q7.4 v1(1115.88,1447.6) Q1.2
  Bottom Layer w20: v1(985,1560) 1096.64,1448.36 1115.12,1448.36 v1(1115.88,1447.6)
  other v1: 885,1300 885,1345 885,1405 885,1565
NetQ9_4: Q9.4 U8.3 | length 85.2
  Top Layer w30: Q9.4 U8.3
NetQ9_6: Q9.6 U8.1 | length 85.2
  Top Layer w30: Q9.6 U8.1
NetR2_1: R2.1 R22.2 U6.3 | length 241.3
  Top Layer w20: R2.1 1652.23,1095.74 1652.23,1174.05 R22.2 1652.96,1176.75 1662.65,1186.43 1665.8,1186.43 1674.36,1195 U6.3
NetR3_1: R3.1 U8.5 | length 87
  Top Layer w30: R3.1 2384.6,1288.27 2389.29,1283.58 2389.29,1270.28 2390,1269.56 U8.5
NetR4_2: R4.2 U8.2 | length 268.8
  Top Layer w30: U8.2 2390,1126.86 2413.14,1150 2462.43,1150 2480,1167.57 2480,1270.47 2461.97,1288.51 R4.2
NetR13_2: R13.2 R14.1 U4.3 | length 171.2
  Top Layer w30: R14.1 286.13,2164.64 286.13,2074 R13.2 286.29,2073.12 364.36,2073.12 U4.3
NetR17_1: R17.1 U3.5 | length 279.5
  Top Layer w30: R17.1 2504.85,2230.15 2620,2115 U3.5
NetR17_2: R17.2 SW1.1 | length 450
  Top Layer w30: R17.2 2380.38,2234.83 2380.38,2325.38 2458.59,2403.59 SW1.1
NetR24_2: R24.2 R25.1 USB2.A7 USB2.B7 | length 1054.5
  Top Layer w10: R25.1 2301.49,2935 v1(2370,2935) ; v1(2685,2915) 2685,2911.21 2690,2906.21 2690,2821.49 R24.2 ; USB2.B7 2975.47,2620.47 2985,2630 v1(2985,2640) 2985,2650 2975.16,2659.84 USB2.A7
  Bottom Layer w10: v1(2370,2935) 2665,2935 2958,2642 2983,2642 v1(2985,2640)
NetR26_2: R26.2 USB2.A6 USB2.B6 | length 800
  Top Layer w10: R26.2 2306.49,2835 v1(2375,2835) ; USB2.A6 2866.21,2640.16 2856.32,2650.05 v1(2856.32,2660.68) 2856.32,2671.32 2865.43,2680.43 2926.09,2680.43 USB2.B6
  Bottom Layer w10: v1(2375,2835) 2670,2835 2755,2750 2767,2750 v1(2856.32,2660.68)
NetU1_3: 
NetU1_25: 
NRST: Jb.18
PA0: Jb.15
PA1: Jb.14 Q5.1 | length 518.7
  Top Layer w20: Jb.14 2137.6,3117.4 Q5.1
PA2: Jb.13 R20.2 U6.1 | length 3145.6
  Top Layer w10: Jb.13 2133.87,3021.13 2443.02,3021.13 2595,2869.14 2595,2630 2180,2215 2180,1650.3 1824.7,1295 U6.1
  Top Layer w20: R20.2 1725.08,1350 1780.08,1295 U6.1
PA3: Jb.12 U2.7 | length 2061.4
  Top Layer w10: U2.7 850,2404.51 726.12,2528.39 656.61,2528.39 605,2580 605,2955 1005,3355 1005,3440 1039,3474 1505.6,3474 1537.6,3442 1613,3442 Jb.12
PA4: Jb.11 U2.6 | length 1782.1
  Top Layer w10: U2.6 900,2404.51 792.69,2511.81 705,2599.51 705,2990.6 1097,3382.6 1097,3424.02 1130.98,3458 1497,3458 Jb.11
PA5: Jb.10 U2.3 | length 1681.4
  Top Layer w10: U2.3 1050,2404.51 914.51,2540 835,2540 805,2570 805,3041.18 1113,3349.18 1113,3417.4 1137.6,3442 1372.4,3442 1409,3405.4 1449.6,3405.4 Jb.10
PA6: Jb.9 U2.2 | length 1307.5
  Top Layer w10: U2.2 1100,2404.51 906.18,2598.32 906.18,2989.62 1314.86,3398.29 1353.29,3398.29 Jb.9
PA7: Jb.8 R11.2 | length 1860.7
  Top Layer w10: R11.2 1336.82,1963.56 1803.26,2430 v1(1804.13,2430)
  Bottom Layer w10: Jb.8 1805,2850 1805,2430.87 v1(1804.13,2430)
PA8: Ja.7
PA9: Ja.8
PA10: Ja.9
PA11: Ja.10 R25.2 | length 907.9
  Top Layer w10: Ja.10 1644.63,2810 1950,2810 2053.35,2913.35 2218.82,2913.35 2233.51,2928.03 R25.2
PA12: Ja.11 R26.1 | length 774.5
  Top Layer w10: Ja.11 1704.63,2770 1980,2770 2050,2840 R26.1
PA15: C15.1 Ja.12 R1.2 SW2.1 | length 1712.3
  Top Layer w10: SW2.1 243.59,2981.41 319.2,2905.8 347.71,2905.8 R1.2 350,2799.6 359.6,2790 v1(410,2790) v1@404.57,2795.43
  Bottom Layer w10: v1(410,2790) 1485.37,2790 Ja.12
PB0: Jb.7
PB1: FPC2.8 Jb.6 | length 2494.8
  Top Layer w10: FPC2.8 1690.28,1672.32 1697.09,1665.51 1697.45,1665.51 1714.73,1648.23 v1(1810.2,1648.23)
  Bottom Layer w10: Jb.6 1105,3450 1282.59,3450 1305,3427.59 1305,3372.63 1905,2772.63 1905,1743.04 v1(1810.2,1648.23)
PB2: FPC2.9 Jb.5 | length 1916.3
  Top Layer w10: v1(1650.57,1884.43) 1650.74,1884.26 1650.74,1820.13 FPC2.9
  Bottom Layer w10: Jb.5 960,3400 1705,2655 1705,1938.87 v1(1650.57,1884.43)
PB3: Ja.13
PB4: FPC2.20 Ja.14 | length 1441.6
  Top Layer w10: FPC2.20 1217.84,1860.1 1223.7,1865.96 1290.72,1865.96 1296.57,1860.1 1296.57,1793.43 1315.24,1774.76 1359.14,1774.76 1365,1780.62 1365,1862.53 1855,2352.53 Ja.14
PB5: FPC2.19 Ja.15 | length 1268.7
  Top Layer w10: FPC2.19 1258.71,1818.46 1258.71,1781.29 1285,1755 1369.14,1755 1383.73,1769.59 1383.73,1858.63 1955,2429.9 Ja.15
PB6: FPC2.18 Ja.16 | length 2986
  Top Layer w10: FPC2.18 1296.57,1618.43 1505,1410 1875,1410 2145,1680 2145,2220 2575,2650 2575,2748.14 2569.14,2754 2114,2754 2055,2695 Ja.16
PB7: FPC2.14 Ja.17 | length 2239
  Top Layer w10: FPC2.14 1454.06,1672.32 1651.38,1475 1895,1475 2110,1690 2110,2275 2405,2570 2405,2671.81 2381.81,2695 2229.63,2695 Ja.17
PB8: FPC2.13 Ja.18 | length 1115.9
  Top Layer w10: FPC2.13 1493.43,1837.68 1538.64,1882.89 2245.05,2589.3 2245.05,2610.42 Ja.18
PB9: FPC2.12 Ja.19 | length 1718.6
  Top Layer w10: FPC2.12 1532.8,1672.32 1539.61,1665.51 1543.19,1665.51 1673.7,1535 1905,1535 2055,1685 2055,2320.37 Ja.19
PB10: FPC2.23 Jb.3 | length 2936.8
  Top Layer w10: Jb.3 755,3460 785,3490 1680,3490 1700,3470 1700,2940 1405,2645 1405,2595 1420,2580 1420,2550 1205,2335 1205,1955.39 1143.52,1893.91 1143.52,1881.47 1099.72,1837.68 FPC2.23
PB12: Ja.3
PB13: Ja.4
PB14: Ja.5
PB15: Ja.6 Q1.1 | length 1965.7
  Top Layer w10: v1(1180,1595) 1180,1527.87 1185.47,1522.4 Q1.1
  Bottom Layer w10: Ja.6 939.63,2505 680,2505 530,2355 530,1860 755,1635 1140,1635 v1(1180,1595)
PC13: Jb.16
VCC: BUZZER2.1 BUZZER.1 C1.2 C9.1 C10.1 C11.1 C12.1 Jb.1 R1.1 R24.1 U2.4 U2.8 U3.8 U5.1 U5.3 | length 6169.2
  Top Layer w20: U5.1 2637.6,2551.31 2649.32,2563.02 2699.14,2563.02 2712.24,2549.92 U5.3@2712.24,2521.54 ; U5.3@2712.4,2521.38 2715.59,2524.57 2798.03,2524.57 C1.2
  Top Layer w30: R1.1 513.16,2966.49 ; U2.4 1000,2343.09 915,2258.09 835,2258.09 800,2293.09 U2.8 678.82,2381.18 455,2605 455,2908.34 513.16,2966.49 ; U3.8 2675.93,1965 2689.57,1951.36 C10.1 C9.1 C12.1 ; BUZZER2.1@2722,3033.56 2722,3031.56 2755,2998.56 2755,2567.6 C1.2@2798.03,2524.57 ; BUZZER2.1 2721.41,3040.16 2674.84,3040.16 2580,3135 BUZZER.1 2570.79,3146.06 2519.75,3197.09 2519.75,3408.79 2412.54,3516 626,3516 565.32,3455.32 565.32,3410.32 Jb.1 555,3008.34 513.16,2966.49
  Bottom Layer w30: v1(2675,2565) 2690,2550 v1(2690,1920)
VH: C4.1 D1.1 FPC2.6 FPC2.7 FPC2.25 FPC2.26 R13.1 | length 147
  Top Layer w30: FPC2.7 1729.65,1808.62 1770,1768.27 1770,1691.02 FPC2.6
  other v1: 945,1695 1770,1729.64 945,1740 1769.02,1769.25 180,1845 230,1845 205,1870 180,1895 230,1895 275,2005 320,2005
VHG: FPC2.10 FPC2.11 FPC2.21 FPC2.22 Q6.2 Q6.5 Q7.2 Q7.5 Q8.1 R23.1 | length 2451
  Top Layer w30: Q8.1 373.05,1910.35 373.05,1810.45 R23.1@373.51,1810 ; R23.1@378.51,1810.66 R23.1 378.88,1812.25 378.88,1768.02 661.91,1485 ; v1(1138.73,1742.67) 1138.73,1729.68 1139.1,1729.31 v1(1139.1,1716.32) FPC2.22 1139.1,1542.04 1082.06,1485 Q7.5 1008.56,1485 ; v1@1139.1,1742.67 v1(1139.1,1769.26) 1178.47,1808.62 FPC2.21 ; FPC2.11 1572.16,1808.62 1611.54,1769.25 FPC2.10 ; 661.91,1485 661.91,1273.09 690,1245 1087.43,1245 1105,1262.57 1105,1350 1055,1400 1022.01,1400 1004.44,1417.57 1004.44,1485 1008.56,1485 ; 661.91,1485 Q6.2 Q6.5 Q7.2 1008.56,1485
  other v1: 1610,1745 1600,1785
pads on no net: BAT2. Designator7.4 Designator7.5 FPC2.4 FPC2.5 FPC2.24 Ja.2 Ja.20 Jb.4 Jb.17 Jb.20 Q9.2 Q9.5 SW1.2 SW2.2 U2.1 U2.5 U4.6 U5.4 U6.5 U6.6 U6.7 U8.4 USB2. USB2.A5 USB2.A8 USB2.B5 USB2.B8

## Polygon pours and split planes (outlines as drawn)
GND on Top Layer "GND_L01_P029" (solid, pour order 29): 250,3515 245,3520 165,3520 30,3385 40,3375 40,80 160,-40 170,-30 3105,-30 3190,55 3190,3355 3020,3525
BAT- on Top Layer "BAT-_L01_P028" (solid, pour order 28): 2305,940 2375,940 2375,865 2370,860 2415,815 2953.75,811.69 2953.75,1535 3170,1535 3170,720 3170,480 2305,480
+5V on Top Layer "+5V_L01_P025" (solid, pour order 25): 2850,2484.51 2956.16,2484.51 2962.53,2487.14 2981.75,2506.36 2984.38,2512.72 2984.38,2540.33 2985.3,2544.29 2976.3,2553.29 2870,2553.29 2870,2598.24 2824.95,2657.71 2822.57,2762.58 3045,2762.58 3043.08,2661.92 3190,2515 3190,1820.22 2850,1825.3
NetQ1_2 on Top Layer "NETQ1_2_L01_P020" (solid, pour order 20): 795,1555 830,1590 1080,1590 1080,1305 1050,1275 800,1275
+5V on Top Layer "+5V_L01_P026" (solid, pour order 26): 2878.72,2502.51 2952.43,2502.51 2966.38,2516.45 2966.38,2535.29 2878.72,2535.29
VH on Top Layer "VH_L01_P017" (solid, pour order 17): 1790,1915 1825,1880 1825,1545 1085,1547.44 1085,1594.92 891.42,1594.92 890,1919.07
BAT on Top Layer "BAT_L01_P023" (solid, pour order 23): 500,1975 500,1190 1310,1190 1495,1005 2015,1005 2115,1105 2115,1540 2220,1645 2220,2095 2404.01,2095 2405,2095.99 2420,2080.99 2425,1580 2425,1315 2265,1315 2265,993.57 2100,805 1310,805 1255,860 270,860 270,454.2 93.48,454.2 87.66,1508.75 264.88,1509.44 264.88,1975
BAT on Top Layer "BAT_L01_P015" (solid, pour order 15): 2245,2110 2405,2110 2405,1925 2450,1880 2450,1410 2415,1375 2415,1320 2245,1320
NetL2_1 on Top Layer "NETL2_1_L01_P016" (solid, pour order 16): 2705,2050 2705,1990 2640,1990 2640,1595 2505,1595 2495,1605 2495,2005 2480,2050
VH on Top Layer "VH_L01_P024" (solid, pour order 24): 351.64,2023.36 351.64,1810.45 155,1810.45 155,1815 155,1835 155,1920 190,1920 190,2023.36 65,2023.36 64.16,2127.79 255.38,2127.46 255,2060 255,2023.36
GND on Bottom Layer "GND_L02_P027" (solid, pour order 27): 250,3515 245,3520 165,3520 30,3385 40,3375 40,80 160,-40 170,-30 3105,-30 3190,55 3190,3355 3020,3525
NetQ1_2 on Bottom Layer "NETQ1_2_L02_P021" (solid, pour order 21): 825,1610 915,1610 915,1375 915,1270 825,1270
VH on Bottom Layer "VH_L02_P019" (solid, pour order 19): 880,1820 880,1680 897.5,1662.5 1800,1662.5 1800,1815 1755,1860
VH on Bottom Layer "VH_L02_P022" (solid, pour order 22): 155.36,2032.45 155.36,1815.49 199.59,1815.49 200,1585 230,1585 320,1495 320,1030 1285,1030 1355,1100 1355,1700 1175,1700 1175,1171.25 389,1178.93 389,2032.45
VHG on Bottom Layer "VHG_L02_P018" (solid, pour order 18): 1080,1795 1080,1745 1120,1705 1125,1710 1675,1710 1675,1810 1680,1815 1670,1825 1100,1825

## Silkscreen, mask and mechanical layers (free items; w line width, h text height)
Mechanical 1:
  lines w10: 160,3545 10,3395 10,65 130,-55 3129.89,-55 3204.21,19.09 3209.5,3400.76 3065.34,3545.37 162.77,3545.37 ; 1053.91,507.31 2471.22,507.31 ; 1071.22,507.31 cw(c1066.38,600.89) 972.8,596.04 cw(c1071.22,605.74) 1061.53,704.16 2471.22,704.16 cw(c2470.92,605.44) 2471.22,506.71

## Text inside footprints (layer, text, board x,y; h text height)
BAT2: Top Overlay "-" at 2808.94,1318.13 h118.11 r270; Top Overlay "+" at 309.76,1281.37 h118.11 r45; Top Overlay "-" at 2808.94,558.13 h118.11 r270; Top Overlay "+" at 231.24,516.37 h118.11 r315; Bottom Overlay "18650" at 1294.69,1110.32 h157.48 r180; Bottom Overlay "-" at 2903.94,1318.13 h118.11 r270; Bottom Overlay "+" at 321.24,1364.89 h118.11 r225; Bottom Overlay "+" at 326.24,599.89 h118.11 r225; Bottom Overlay "-" at 2903.94,558.13 h118.11 r270; Bottom Overlay "18650" at 1933,444.39 h157.48
BUZZER: Top Overlay "+" at 2563.07,3186.82 h50 r45
Designator7: Top Overlay "M2*5x2" at 545,315 h80; Top Overlay "JX-700-48R" at 298.78,1023.78 h78.74